# Altium PCB H-Bridge v0.1.0.PCBDOC (part 2 of 2)
Units mm, origin at the board's own origin, x right, y up, seen from the top; angles counter-clockwise.
Board outline 152.4 x 152.4 mm, 2 copper layers (Top Layer, Bottom Layer); 182 components, 35 nets, 380 pads, 57 vias.
Unrouted connection lines stored in the file: 2.
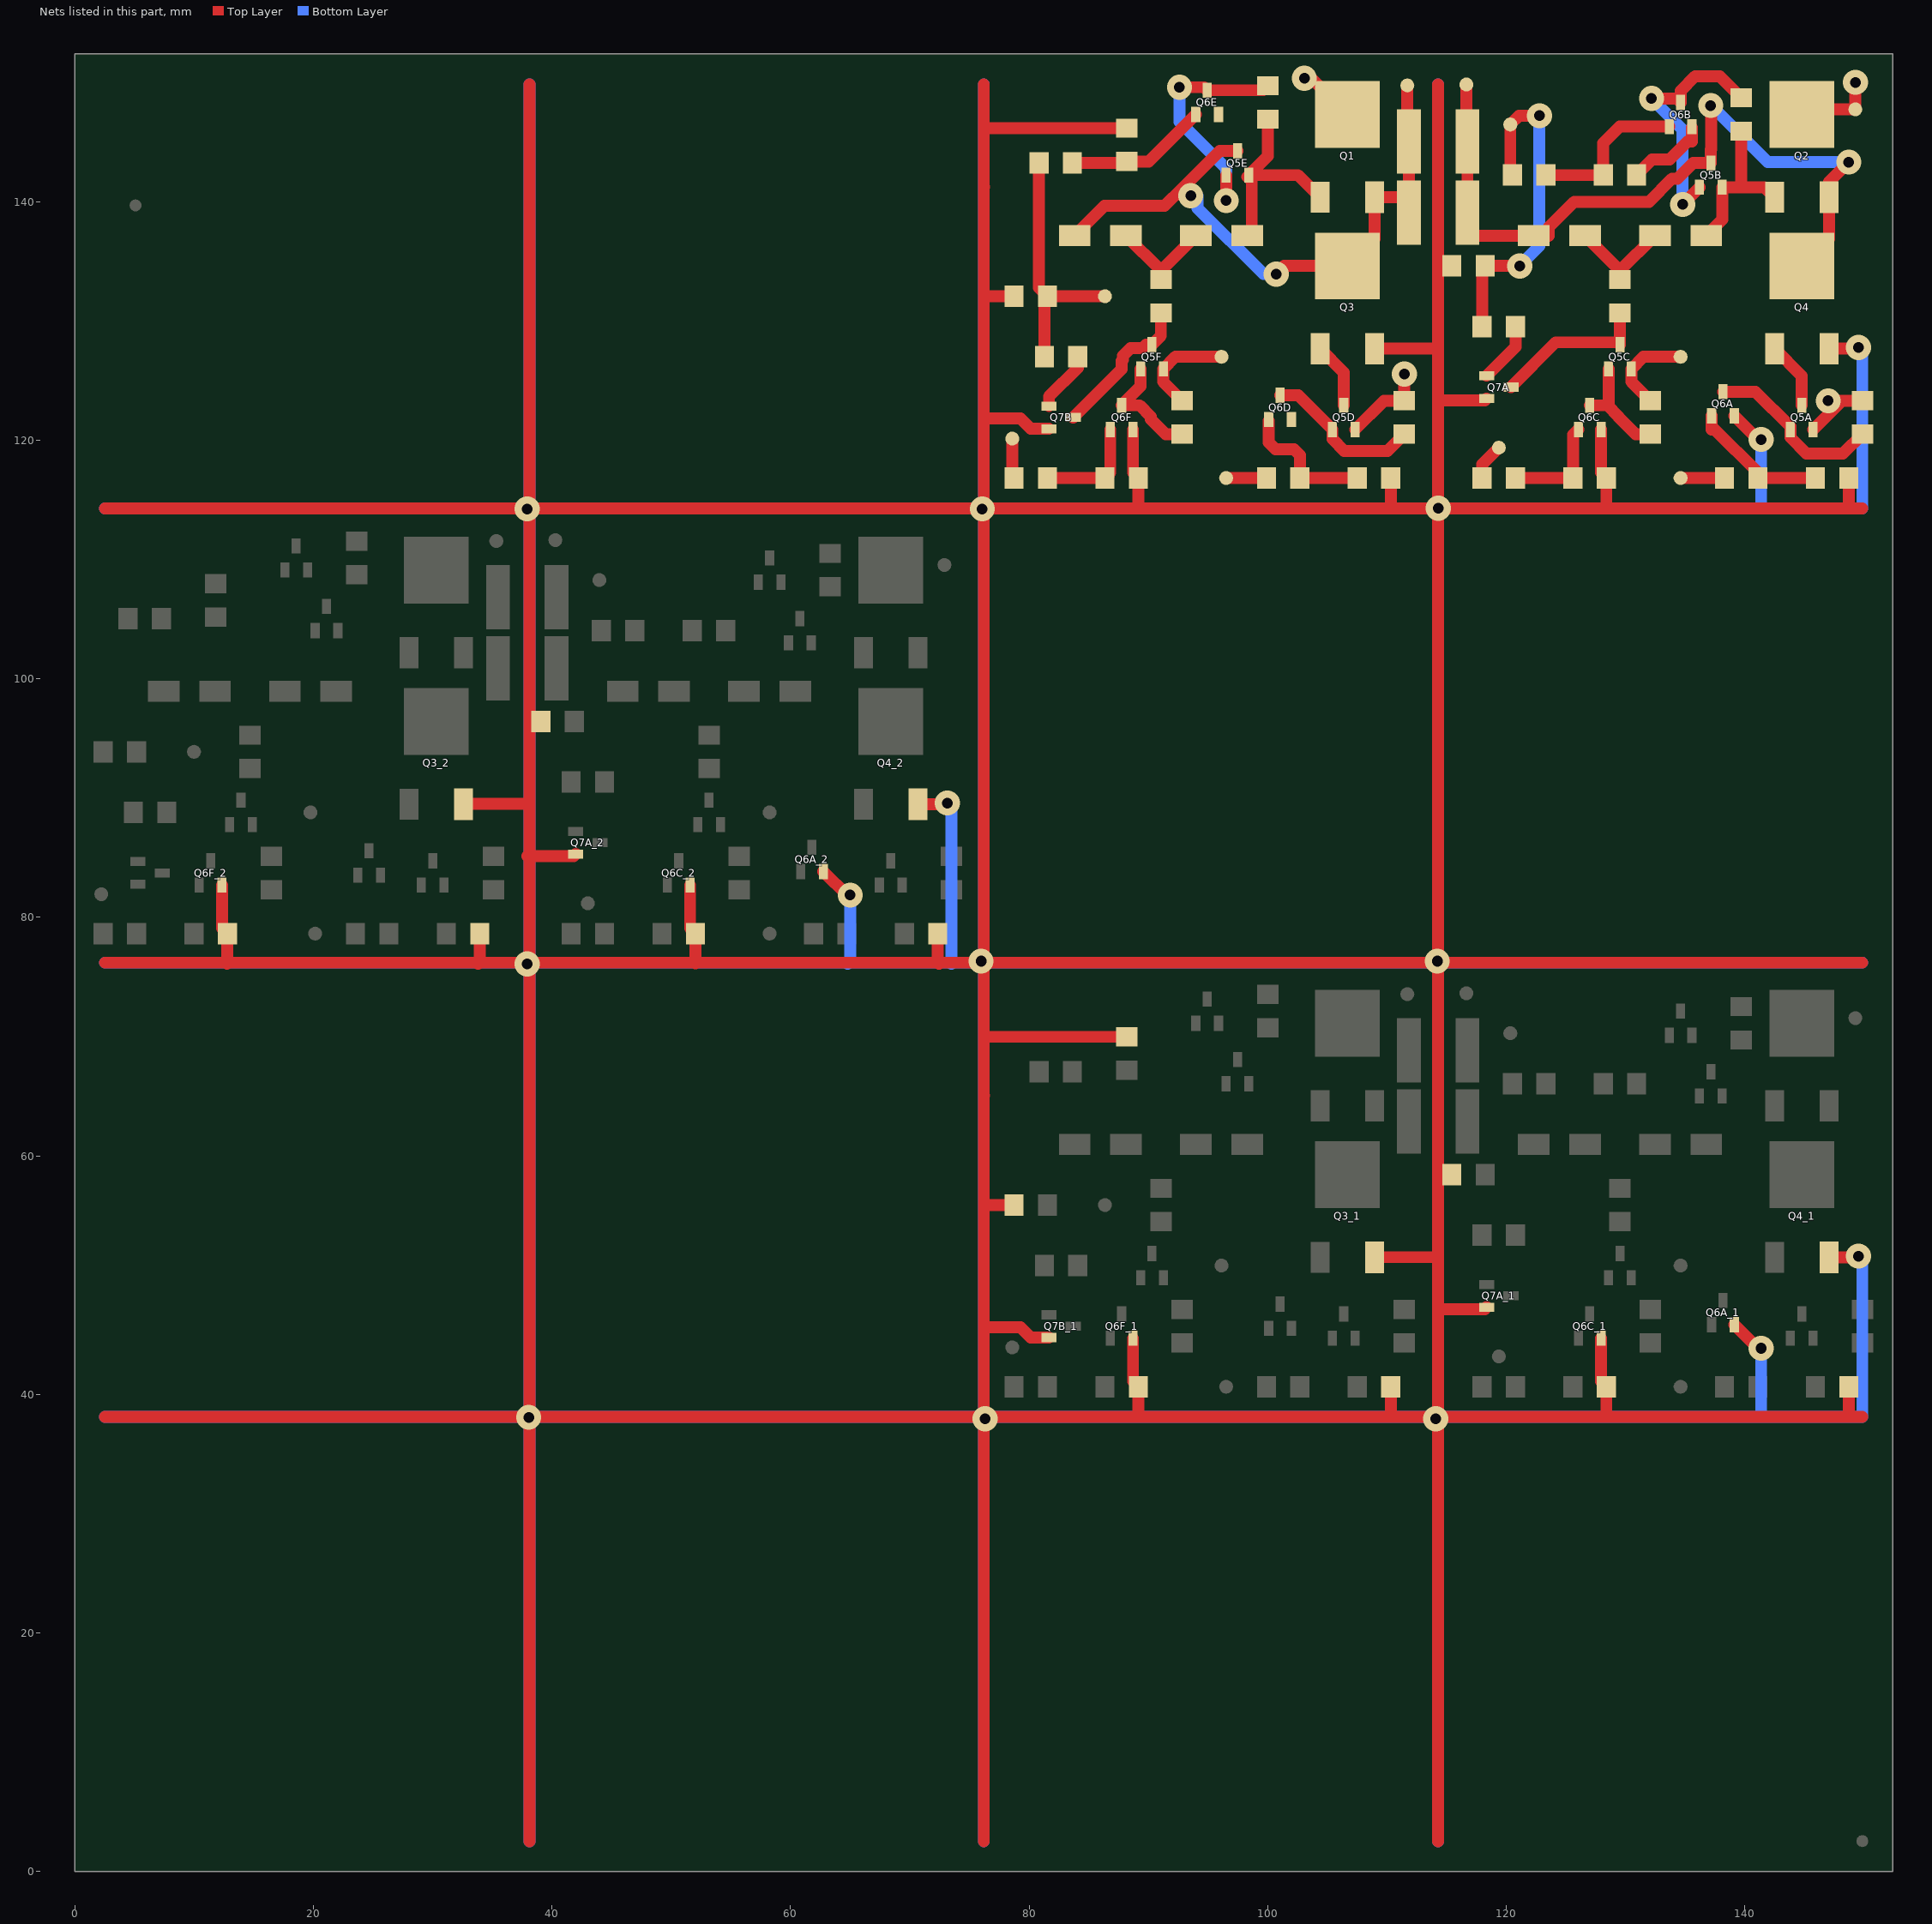
[diagram p2: the nets of this part, all layers, seen from the top]

## Part data
C1A C1A_1 C1A_2 C1B C1B_1 C1B_2: library part "100nF 1206 50V", "Non-polarized", Capacitance=100nF, Manufacturer=Kemet, Manufacturer Part Number=C1206C104K5RAC7867, Operating Temperature="-55°C ~ 125°C", Package / Case="1206 (3216 Metric)", Ratings=-, Supplier Part Number 1=399-1249-1-ND, Temperature Coefficient=X7R, Tolerance=±10%, Voltage - Rated=50V, Applications="General Purpose", Category=Capacitors, ComponentLink1Description="Spec Sheet", ComponentLink1URL=http://www.kemet.com/docfinder?Partnumber=C1206C104K5RACTU, Features=-, Height - Seated (Max)=-, Lead Spacing=-, Lead Style=-, Mounting Type="Surface Mount, MLCC", Packaging="Cut Tape (CT)", Price P/N=020101-001, Pricing 1="1=0.13, 10=0.095, 25=0.068, 50=0.052, 100=0.044, 250=0.036, 1000=0.02351 (CAD)", RoHS="RoHS Compliant", Size / Dimension="0.126\" L x 0.063\" W (3.20mm x 1.60mm)", Stock 1=910232, Supplier 1=Digi-Key, Technology=SMT, Thickness (Max)="0.035\" (0.88mm)"
C2 C2_1 C2_2 C3 C3_1 C3_2: Capacitance=1µF, Manufacturer="TDK Corporation", Manufacturer Part Number=CGA9P4X7T2W105M250KE, Operating Temperature="-55°C ~ 125°C", Package / Case=2220, Ratings=AEC-Q200, Supplier Part Number 1=445-7998-1-ND, Temperature Coefficient=X7T, Tolerance=±20%, Voltage - Rated=450V, Applications="Automotive, Boardflex Sensitive", Category=Capacitors, ComponentLink1Description="Spec Sheet", ComponentLink1URL=https://product.tdk.com/info/en/catalog/datasheets/mlcc_automotive_soft_en.pdf, Failure Rate=-, Features="Soft Termination", Height - Seated (Max)=-, Lead Spacing=-, Lead Style=-, Mounting Type="Surface Mount, MLCC", Packaging="Cut Tape (CT)", Part Status=Active, Pricing 1="1=3.11, 10=2.576, 100=2.1589, 250=1.78012 (USD)", RoHS="RoHS Compliant", Size / Dimension="0.224\" L x 0.197\" W (5.70mm x 5.00mm)", Stock 1=10247, Supplier 1=Digi-Key, Thickness (Max)="0.098\" (2.50mm)"
D1A D1A_1 D1A_2 D1B D1B_1 D1B_2 D2A D2A_1 D2A_2 D2B D2B_1 D2B_2: "Signal Diode", Capacitance @ Vr, F="10pF @ 4V, 1MHz", Current - Average Rectified (Io)=1A, Current - Reverse Leakage @ Vr="5µA @ 1000V", Manufacturer="Fairchild Semiconductor", Manufacturer Part Number=RS1M, Operating Temperature - Junction="-55°C ~ 150°C", Package / Case="DO-214AC, SMA", Supplier Device Package="SMA (DO-214AC)", Supplier Part Number 1=RS1MFSCT-ND, Voltage - DC Reverse (Vr) (Max)="1000V (1kV)", Voltage - Forward (Vf) (Max) @ If="1.3V @ 1A", Category="Discrete Semiconductor Products", ComponentLink1Description="Spec Sheet", ComponentLink1URL=http://www.fairchildsemi.com/datasheets/RS/RS1M.pdf, Diode Type=Standard, Mounting Type="Surface Mount", Packaging="Cut Tape (CT)", Price P/N=020107-002, Pricing 1="1=0.47, 10=0.339, 25=0.2632, 100=0.1993, 250=0.14092, 500=0.11282, 1000=0.08654, 2500=0.07522 (CAD)", Reverse Recovery Time (trr)=500ns, RoHS="RoHS Compliant", Speed="Fast Recovery =< 500ns, > 200mA (Io)", Stock 1=3125, Supplier 1=Digi-Key, Technology=SMT
FD1: library part "Fiducial, Top Only", Technology=Mechanical
Q1 Q1_1 Q1_2 Q2 Q2_1 Q2_2 Q3 Q3_1 Q3_2 Q4 Q4_1 Q4_2: Current - Continuous Drain (Id) @ 25°C="7.4A (Tc)", Drain to Source Voltage (Vdss)=250V, Drive Voltage (Max Rds On,  Min Rds On)=10V, Input Capacitance (Ciss) (Max) @ Vds="700pF @ 25V", Manufacturer="Fairchild/ON Semiconductor", Manufacturer Part Number=FQD9N25TM, Operating Temperature="-55°C ~ 150°C (TJ)", Package / Case="TO-252-3, DPak (2 Leads + Tab), SC-63", Power Dissipation (Max)="2.5W (Ta), 55W (Tc)", Supplier Device Package=D-Pak, Supplier Part Number 1=FQD9N25TMCT-ND, Category="Discrete Semiconductor Products", ComponentLink1Description="Spec Sheet", ComponentLink1URL=https://www.fairchildsemi.com/datasheets/FQ/FQD9N25.pdf, FET Feature=-, FET Type=N-Channel, Gate Charge (Qg) (Max) @ Vgs="20nC @ 10V", Mounting Type="Surface Mount", Packaging="Cut Tape (CT)", Part Status=Active, Pricing 1="1=0.86, 10=0.766, 100=0.597, 500=0.49316, 1000=0.38934 (USD)", Rds On (Max) @ Id, Vgs="420 mOhm", RoHS="RoHS Compliant", Stock 1=4941, Supplier 1=Digi-Key, Technology="MOSFET (Metal Oxide)", Vgs (Max)=±30V, Vgs(th) (Max) @ Id="5V @ 250µA"
Q5A Q5A_1 Q5A_2 Q5B Q5B_1 Q5B_2 Q5C Q5C_1 Q5C_2 Q5D Q5D_1 Q5D_2 Q5E Q5E_1 Q5E_2 Q5F Q5F_1 Q5F_2: library part "P Channel MOSFET 3.5A", "P Channel MOSFET", Current - Continuous Drain (Id) @ 25°C="3.5A (Ta)", Drain to Source Voltage (Vdss)=30V, Input Capacitance (Ciss) @ Vds="432pF @ 15V", Manufacturer="Diodes Incorporated", Manufacturer Part Number=DMP3130L-7, Package / Case="TO-236-3, SC-59, SOT-23-3", Power - Max=1.4W, Supplier Device Package=SOT-23-3, Supplier Part Number 1=DMP3130LDICT-ND, Category="Discrete Semiconductor Products", ComponentLink1Description="Spec Sheet", ComponentLink1URL=http://www.diodes.com/datasheets/ds31524.pdf, FET Feature="Logic Level Gate", FET Type="MOSFET P-Channel, Metal Oxide", Gate Charge (Qg) @ Vgs="12nC @ 10V", Mounting Type="Surface Mount", Packaging="Cut Tape (CT)", Price P/N=020166-006, Pricing 1="1=0.57, 10=0.444, 25=0.3736, 100=0.3047, 250=0.2524, 500=0.20848, 1000=0.15615 (CAD)", Rds On (Max) @ Id, Vgs="77 mOhm @ 4.2A, 10V", RoHS="RoHS Compliant", Stock 1=76890, Supplier 1=Digi-Key, Technology=SMT, Vgs(th) (Max) @ Id="1.3V @ 250µA"
Q6A Q6A_1 Q6A_2 Q6B Q6B_1 Q6B_2 Q6C Q6C_1 Q6C_2 Q6D Q6D_1 Q6D_2 Q6E Q6E_1 Q6E_2 Q6F Q6F_1 Q6F_2 Q7A Q7A_1 Q7A_2 Q7B Q7B_1 Q7B_2: library part "N Channel MOSFET", "N Channel MOSFET", Current - Continuous Drain (Id) @ 25°C="300mA (Ta)", Drain to Source Voltage (Vdss)=60V, Input Capacitance (Ciss) @ Vds="50pF @ 10V", Manufacturer="NXP Semiconductors", Manufacturer Part Number=2N7002,215, Package / Case="TO-236-3, SC-59, SOT-23-3", Power - Max=830mW, QuickValue=2N7002, Supplier Device Package="SOT-23 (TO-236AB)", Supplier Part Number 1=568-1369-1-ND, Category="Discrete Semiconductor Products", ComponentLink1Description="Spec Sheet", ComponentLink1URL=http://www.nxp.com/documents/data_sheet/2N7002.pdf, FET Feature="Logic Level Gate", FET Type="MOSFET N-Channel, Metal Oxide", Gate Charge (Qg) @ Vgs=-, Mounting Type="Surface Mount", Packaging="Cut Tape (CT)", Price P/N=020166-005, Pricing 1="1=0.18, 10=0.167, 25=0.1512, 100=0.109, 250=0.06416, 500=0.05324, 1000=0.03632 (CAD)", Rds On (Max) @ Id, Vgs="5 Ohm @ 500mA, 10V", RoHS="RoHS Compliant", Stock 1=765228, Supplier 1=Digi-Key, Technology=SMT, Vgs(th) (Max) @ Id="2.5V @ 250µA"
R2A R2A_1 R2A_2 R2B R2B_1 R2B_2 R2C R2C_1 R2C_2 R2D R2D_1 R2D_2 R2E R2E_1 R2E_2 R2F R2F_1 R2F_2 R4A R4A_1 R4A_2 R4B R4B_1 R4B_2 R4C R4C_1 R4C_2 R4D R4D_1 R4D_2 R4E R4E_1 R4E_2 R4F R4F_1 R4F_2 R6A R6A_1 R6A_2 R6B R6B_1 R6B_2: library part "10k 1206 1%", "Resistor", Manufacturer="Vishay Dale", Manufacturer Part Number=CRCW120610K0FKEA, Package / Case="1206 (3216 Metric)", Power (Watts)="0.25W, 1/4W", Resistance (Ohms)=10k, Supplier Part Number 1=541-10.0KFCT-ND, Temperature Coefficient=±100ppm/°C, Tolerance=±1%, Category=Resistors, ComponentLink1Description="Spec Sheet", ComponentLink1URL=http://www.vishay.com/docs/20035/dcrcwe3.pdf, Composition="Thick Film", Features="Automotive AEC-Q200 Qualified", Height="0.024\" (0.60mm)", Number of Terminations=2, Packaging="Cut Tape (CT)", Price P/N=020100-004, Pricing 1="10=0.131, 50=0.0704, 200=0.0404, 1000=0.02755 (CAD)", RoHS="RoHS Compliant", Size / Dimension="0.126\" L x 0.063\" W (3.20mm x 1.60mm)", Stock 1=393912, Supplier 1=Digi-Key, Supplier Device Package="1206 (3216 Metric)", Technology=SMT
R3A R3A_1 R3A_2 R3B R3B_1 R3B_2 R3C R3C_1 R3C_2 R3D R3D_1 R3D_2 R3E R3E_1 R3E_2 R3F R3F_1 R3F_2 R5A R5A_1 R5A_2 R5B R5B_1 R5B_2: "Resistor", Manufacturer=Yageo, Manufacturer Part Number=RC1206FR-07100RL, Operating Temperature="-55°C ~ 155°C", Package / Case="1206 (3216 Metric)", Power (Watts)="0.25W, 1/4W", Resistance (Ohms)=100R, Supplier Device Package=1206, Supplier Part Number 1=311-100FRCT-ND, Temperature Coefficient=±100ppm/°C, Tolerance=±1%, Category=Resistors, ComponentLink1Description=http://www.yageo.com/documents/recent/PYu-RC_Group_51_RoHS_L_6.pdf, ComponentLink1URL=http://www.yageo.com/documents/recent/PYu-RC_Group_51_RoHS_L_6.pdf, Composition="Thick Film", Failure Rate=-, Features="Moisture Resistant", Height - Seated (Max)="0.026\" (0.65mm)", Packaging="Cut Tape (CT)", Part Status=Active, Pricing 1="1=0.15, 10=0.044, 25=0.032, 50=0.0242, 100=0.0178, 250=0.0136, 500=0.01088, 1000=0.00801 (CAD)", RoHS="RoHS Compliant", Size / Dimension="0.122\" L x 0.063\" W (3.10mm x 1.60mm)", Stock 1=1567506, Supplier 1=Digi-Key, Technology=SMT
FD2: Technology=Mechanical

## Via types
v1: diameter 2.1, hole 0.9, Top Layer to Bottom Layer, 57 vias

## Nets (pads, with @x,y where several pads share a name; then routed paths per layer and width w, separated by ;. In a path a pad name is that pad's centre, name@x,y a point inside that pad or via, vN(x,y) a via of type N, cw(c..) or ccw(c..) an arc to the next point about the centre after c; other vN are vias at no path point)
10VDC: Q5A.2 Q5D.2 R2A.1 R2D.1 | length 13.6
  Top Layer w1: Q5D.2@107.332,120.904 109.748,123.32 R2D.1@111.46,123.32 v1(111.46,125.557) ; Q5A.2@145.732,120.904 148.148,123.32 ; v1(146.993,123.32) 148.148,123.32 ; R2A.1@149.86,123.32 148.148,123.32
GND: GND1.1 GND1_1.1 GND1_2.1 Q3.3 Q3_1.3 Q3_2.3 Q4.3 Q4_1.3 Q4_2.3 Q6A.2 Q6A_1.2 Q6A_2.2 Q6B.2 Q6C.2 Q6C_1.2 Q6C_2.2 Q6D.2 Q6E.2 Q6F.2 Q6F_1.2 Q6F_2.2 Q7A.2 Q7A_1.2 Q7A_2.2 Q7B.2 Q7B_1.2 R4A.2 R4A_1.2 R4A_2.2 R4B.2 R4C.2 R4C_1.2 R4C_2.2 R4D.2 R4D_1.2 R4D_2.2 R4E.2 R4E_1.2 R4F.2 R4F_1.2 R4F_2.2 R6A.2 R6A_1.2 R6A_2.2 R6B.2 R6B_1.2 | length 1974.6
  Top Layer w1: 2.54,38.1 149.86,38.1 ; 2.54,76.2 149.86,76.2 ; 2.54,114.3 149.86,114.3 ; R4F_2.2@12.335,79.086 Q6F_2.2@12.335,82.702 ; 12.751,76.098 12.782,76.13 R4F_2.2@12.782,78.638 ; Q3_2.3@32.588,89.484 32.609,89.505 37.799,89.505 37.821,89.484 ; 33.807,76.098 33.942,76.233 R4D_2.2@33.942,78.638 R4D_2.2@34.188,78.392 ; 37.922,85.141 41.821,85.141 Q7A_2.2@41.986,85.306 ; 38.1,2.54 38.1,149.86 ; Q6C_2.2@51.575,82.702 51.575,79.086 R4C_2.2@52.022,78.638 52.022,76.146 ; Q6A_2.2@62.751,83.845 64.808,81.788 64.884,81.864 v1(64.999,81.864) ; Q4_2.3@70.688,89.484 73.05,89.484 v1(73.152,89.586) ; R4A_2.2@72.342,78.638 72.342,76.197 72.441,76.098 ; 76.2,2.54 76.2,149.86 ; 76.2,45.669 76.243,45.626 79.285,45.626 80.144,44.768 Q7B_1.2@81.664,44.768 ; 76.2,55.855 76.225,55.88 R6B_1.2@78.74,55.88 ; 76.2,65.049 76.207,65.056 ; 76.2,70.256 76.476,69.98 R4E_1.2@88.189,69.98 ; 76.2,121.869 76.243,121.826 79.285,121.826 80.144,120.968 Q7B.2@81.664,120.968 ; 76.2,132.055 76.225,132.08 R6B.2@78.74,132.08 ; 76.2,141.249 76.207,141.256 ; 76.2,146.456 76.476,146.18 R4E.2@88.189,146.18 ; R4F_1.2@88.712,41.088 Q6F_1.2@88.712,44.704 ; R4F.2@88.712,117.288 Q6F.2@88.712,120.904 ; 89.129,38.1 89.16,38.131 R4F_1.2@89.16,40.64 ; 89.129,114.3 89.16,114.331 R4F.2@89.16,116.84 ; Q3_1.3@108.966,51.486 108.987,51.507 114.177,51.507 114.198,51.486 ; Q3.3@108.966,127.686 108.987,127.707 114.177,127.707 114.198,127.686 ; 110.185,38.1 110.32,38.235 R4D_1.2@110.32,40.64 R4D_1.2@110.566,40.394 ; 110.185,114.3 110.32,114.435 R4D.2@110.32,116.84 R4D.2@110.566,116.594 ; 114.3,2.54 114.3,149.86 ; 114.3,47.142 118.199,47.142 Q7A_1.2@118.364,47.308 ; 114.3,123.342 118.199,123.342 Q7A.2@118.364,123.508 ; Q6C_1.2@127.952,44.704 127.952,41.088 R4C_1.2@128.4,40.64 128.4,38.148 ; Q6C.2@127.952,120.904 127.952,117.288 R4C.2@128.4,116.84 128.4,114.348 ; R4B.2@130.94,142.24 132.239,143.539 133.688,143.539 135.221,145.072 135.572,145.072 Q6B.2@135.572,146.201 ; Q6A_1.2@139.128,45.847 141.186,43.79 141.262,43.866 v1(141.376,43.866) ; Q6A.2@139.128,122.047 141.186,119.99 141.262,120.066 v1(141.376,120.066) ; Q4_1.3@147.066,51.486 149.428,51.486 v1(149.53,51.587) ; Q4.3@147.066,127.686 149.428,127.686 v1(149.53,127.787) ; R4A_1.2@148.72,40.64 148.72,38.199 148.819,38.1 ; R4A.2@148.72,116.84 148.72,114.399 148.819,114.3
  Bottom Layer w1: 2.54,38.1 149.86,38.1 149.86,51.257 v1(149.53,51.587) ; 2.54,76.2 149.86,76.2 ; 2.54,114.3 149.86,114.3 149.86,127.457 v1(149.53,127.787) ; 38.1,2.54 38.1,149.86 ; 64.795,76.098 64.999,76.302 v1(64.999,81.864) ; v1(73.152,89.586) 73.482,89.256 73.482,76.098 ; 76.2,2.54 76.2,149.86 ; 114.3,2.54 114.3,149.86 ; 141.173,38.1 141.376,38.303 v1(141.376,43.866) ; 141.173,114.3 141.376,114.503 v1(141.376,120.066)
  other v1: 76.302,37.948 114.097,37.948 38.049,38.075 37.922,76.098 75.971,76.327 114.224,76.327 37.922,114.249 76.073,114.249 114.3,114.3
"Low TriggerA": "CIN Bottom Trigger1.1" R3A.1 | length 3.7
  Top Layer w1: 134.62,116.84 R3A.1@138.3,116.84
"Low TriggerB": "DIN Bottom Trigger1.1" R3D.1 | length 3.4
  Top Layer w1: 96.52,116.84 R3D.1@99.9,116.84
Net10VDCA_1: 10VDCA.1 Q5C.2 R2C.1 | length 7.9
  Top Layer w1: R2C.1@132.08,123.32 130.492,124.908 Q5C.2@130.492,125.984 131.508,127 10VDCA.1@134.62,127
Net10VDCB_1: 10VDCB.1 Q5F.2 R2F.1 | length 8.6
  Top Layer w1: R2F.1@92.84,123.32 91.252,124.908 Q5F.2@91.252,125.984 92.268,127 10VDCB.1@96.13,127
NetC1A_1: C1A.1 D1A.2 D2A.1 | length 9
  Top Layer w1: D1A.2@126.61,137.16 C1A.1@129.54,134.23 ; C1A.1@129.54,133.48 C1A.1@129.54,134.23 ; D2A.1@132.47,137.16 C1A.1@129.54,134.23
NetC1A_2: C1A.2 Q5C.3 Q7A.3 | length 13.4
  Top Layer w1: Q7A.3@120.396,124.46 124.155,128.219 129.337,128.219 Q5C.3@129.54,128.016 C1A.2@129.54,130.68
NetC1B_1: C1B.1 D1B.2 D2B.1 | length 8.3
  Top Layer w1: D1B.2@88.12,137.16 91.05,134.23 D2B.1@93.98,137.16
NetC1B_2: C1B.2 Q5F.3 Q7B.3 | length 12.7
  Top Layer w1: Q7B.3@83.696,121.92 87.747,125.972 87.747,126.647 87.866,126.766 87.866,127.075 88.511,127.719 89.495,127.719 89.792,128.016 Q5F.3@90.3,128.016 91.05,128.766 C1B.2@91.05,130.68
NetHVin1_1: HVin1.1 Q1.2 Q2.2 | length 11.2
  Top Layer w1: v1(103.073,150.368) 103.632,150.368 Q1.2@106.68,147.32 ; Q2.2@145.212,147.752 HVin1.1@149.276,147.752 v1(149.276,150.012)
NetQ1_1: D2B.2 Q1.1 Q5E.2 R2E.1 | length 17.3
  Top Layer w1: D2B.2@98.28,137.16 98.67,137.55 98.67,141.705 Q5E.2@98.28,142.095 ; R2E.1@100.013,146.936 100.013,143.828 Q5E.2@98.425,142.24 102.54,142.24 Q1.1@104.394,140.386
NetQ2_1: D2A.2 Q2.1 Q5B.2 R2B.1 | length 15.6
  Top Layer w1: D2A.2@136.77,137.16 138.112,138.502 Q5B.2@138.112,141.224 ; R2B.1@139.7,145.92 139.7,141.224 Q5B.2@138.112,141.224 ; Q2.1@142.494,140.386 141.656,141.224 Q5B.2@138.112,141.224
NetQ3_1: Q3.1 Q5D.3 | length 5.6
  Top Layer w1: Q3.1@104.394,127.686 106.38,125.7 Q5D.3@106.38,122.936
NetQ4_1: Q4.1 Q5A.3 | length 5.7
  Top Layer w1: Q4.1@142.494,127.686 144.78,125.4 Q5A.3@144.78,122.936
NetQ5A_1: Q5A.1 Q6A.3 R2A.2 | length 15
  Top Layer w1: Q6A.3@138.176,124.079 140.894,124.079 143.827,121.145 Q5A.1@143.827,120.904 143.827,120.237 145.167,118.897 148.237,118.897 R2A.2@149.86,120.52
NetQ5B_1: Q5B.1 Q6B.3 R2B.2 | length 21.9
  Top Layer w1: v1(132.182,148.666) 134.29,148.666 Q6B.3@134.62,148.336 134.62,149.301 135.838,150.519 137.901,150.519 R2B.2@139.7,148.72 ; v1(134.798,139.776) 134.798,139.814 Q5B.1@136.207,141.224
  Bottom Layer w1: v1(132.182,148.666) 134.772,146.075 134.772,139.751 v1(134.798,139.776)
NetQ5C_1: Q5C.1 Q6C.3 R2C.2 | length 9.1
  Top Layer w1: Q6C.3@127,122.936 128.492,122.936 129.433,121.995 129.433,121.95 130.864,120.52 R2C.2@132.08,120.52 ; 128.587,123.031 Q5C.1@128.587,125.984
NetQ5D_1: Q5D.1 Q6D.3 R2D.2 | length 13.4
  Top Layer w1: Q6D.3@101.041,123.774 102.557,123.774 Q5D.1@105.427,120.904 105.427,120.099 106.426,119.101 110.041,119.101 R2D.2@111.46,120.52
NetQ5E_1: Q5E.1 Q6E.3 R2E.2 | length 20.9
  Top Layer w1: v1(92.608,149.606) 94.678,149.606 Q6E.3@94.932,149.352 99.629,149.352 R2E.2@100.013,149.736 ; v1(96.52,140.106) Q5E.1@96.52,142.24
  Bottom Layer w1: v1(92.608,149.606) 92.608,146.71 96.52,142.799 v1(96.52,140.106)
NetQ5F_1: Q5F.1 Q6F.3 R2F.2 | length 9.9
  Top Layer w1: Q5F.1@89.347,125.984 89.347,124.523 Q6F.3@87.76,122.936 89.252,122.936 90.193,121.995 90.193,121.777 91.451,120.52 R2F.2@92.84,120.52
NetQ6A_1: Q6A.1 R3A.2 R4A.1 | length 11.8
  Top Layer w1: Q6A.1@137.223,122.047 137.223,120.911 137.49,120.911 141.1,117.302 R3A.2@141.1,116.84 R4A.1@145.92,116.84
NetQ6B_1: Q6B.1 R3B.2 R4B.1 | length 13.6
  Top Layer w1: R3B.2@123.32,142.24 R4B.1@128.14,142.24 128.14,144.929 129.515,146.304 Q6B.1@133.667,146.304
NetQ6C_1: Q6C.1 R3C.2 R4C.1 | length 9.1
  Top Layer w1: R3C.2@120.78,116.84 R4C.1@125.6,116.84 125.6,120.457 Q6C.1@126.047,120.904
NetQ6D_1: Q6D.1 R3D.2 R4D.1 | length 11.6
  Top Layer w1: Q6D.1@100.089,121.639 100.089,119.825 100.673,119.24 102.2,119.24 102.7,118.74 R3D.2@102.7,116.84 R4D.1@107.52,116.84
NetQ6E_1: Q6E.1 R3E.2 R4E.1 | length 12.2
  Top Layer w1: R3E.2@83.633,143.256 R4E.1@88.453,143.256 ; R4E.1@88.189,143.38 90.04,143.38 Q6E.1@93.98,147.32
NetQ6F_1: Q6F.1 R3F.2 R4F.1 | length 9.1
  Top Layer w1: R3F.2@81.54,116.84 R4F.1@86.36,116.84 86.807,117.287 Q6F.1@86.807,120.904
NetQ7A_1: Q7A.1 R5A.2 | length 5.1
  Top Layer w1: Q7A.1@118.364,125.413 120.78,127.829 R5A.2@120.78,129.54
NetQ7B_1: Q7B.1 R5B.2 | length 5.1
  Top Layer w1: Q7B.1@81.664,122.873 81.664,123.676 84.08,126.092 R5B.2@84.08,127
"Top Turn OffA": "CIN Top Off1.1" R3B.1 R5A.1 R6A.1 | length 28.2
  Top Layer w1: R5A.1@117.98,129.54 117.98,134.36 R6A.1@118.24,134.62 v1(121.133,134.62) ; R3B.1@120.345,142.415 120.345,146.482 121.082,147.218 v1(122.784,147.218)
  Bottom Layer w1: v1(121.133,134.62) 122.784,136.271 v1(122.784,147.218)
"Top Turn OffB": "DIN Top Off1.1" R3E.1 R5B.1 R6B.1 | length 21.5
  Top Layer w1: R3E.1@80.833,143.256 80.833,132.787 R6B.1@81.54,132.08 ; R5B.1@81.28,127 81.28,131.82 R6B.1@81.54,132.08 ; 86.36,132.08 R6B.1@81.54,132.08
"Top Turn OnA": "CIN Top On1.1" R3C.1 | length 3.1
  Top Layer w1: R3C.1@117.98,116.84 117.98,117.98 119.38,119.38
"Top Turn OnB": "DIN Top On1.1" R3F.1 | length 3.1
  Top Layer w1: R3F.1@78.588,116.992 78.588,120.142
VbridgeA: C2.2 C3.2 D1A.1 Q2.3 Q4.2 Q5B.3 Vout2.1 | length 61.3
  Top Layer w1: C3.2@116.662,145.147 Vout2.1@116.662,149.835 ; C3.2@116.75,145.059 C2.2@116.75,139.09 116.75,137.428 117.018,137.16 D1A.1@122.31,137.16 123.571,137.16 123.571,137.877 125.699,140.005 131.96,140.005 133.895,141.939 134.351,141.939 135.668,143.256 Q5B.3@137.16,143.256 137.15,143.266 137.15,144.386 137.172,144.409 137.172,148.053 v1(137.15,148.076) ; Q4.2@147.066,136.906 Q2.3@147.066,140.386 147.066,141.681 v1(148.717,143.332)
  Bottom Layer w1: v1(137.15,148.076) 137.191,148.076 141.935,143.332 v1(148.717,143.332)
VbridgeB: C2.1 C3.1 D1B.1 Q1.3 Q3.2 Q5E.3 Vout1.1 | length 51.1
  Top Layer w1: D1B.1@83.82,137.16 86.316,139.656 91.364,139.656 v1@92.885,141.176 ; v1(93.548,140.513) v1@92.885,141.176 ; Q5E.3@97.472,144.272 95.98,144.272 v1@92.885,141.176 ; v1(100.711,133.934) 101.397,134.62 Q3.2@106.68,134.62 ; Q3.2@108.966,136.906 Q1.3@108.966,140.386 C2.1@111.749,140.386 ; C3.1@111.709,145.2 Vout1.1@111.709,149.758 ; C2.1@111.85,139.09 C3.1@111.85,145.059
  Bottom Layer w1: v1(93.548,140.513) 94.132,140.513 94.132,139.453 99.652,133.934 v1(100.711,133.934)
pads on no net: 10VDCA_1.1 10VDCA_2.1 10VDCB_1.1 10VDCB_2.1 "CIN Bottom Trigger1_1.1" "CIN Bottom Trigger1_2.1" "CIN Top Off1_1.1" "CIN Top Off1_2.1" "CIN Top On1_1.1" "CIN Top On1_2.1" "DIN Bottom Trigger1_1.1" "DIN Bottom Trigger1_2.1" "DIN Top Off1_1.1" "DIN Top Off1_2.1" "DIN Top On1_1.1" "DIN Top On1_2.1" C1A_1.1 C1A_1.2 C1A_2.1 C1A_2.2 C1B_1.1 C1B_1.2 C1B_2.1 C1B_2.2 C2_1.1 C2_1.2 C2_2.1 C2_2.2 C3_1.1 C3_1.2 C3_2.1 C3_2.2 D1A_1.1 D1A_1.2 D1A_2.1 D1A_2.2 D1B_1.1 D1B_1.2 D1B_2.1 D1B_2.2 D2A_1.1 D2A_1.2 D2A_2.1 D2A_2.2 D2B_1.1 D2B_1.2 D2B_2.1 D2B_2.2 FD1.0 FD2.0 HVin1_1.1 HVin1_2.1 Q1_1.1 Q1_1.2 Q1_1.3 Q1_2.1 Q1_2.2 Q1_2.3 Q2_1.1 Q2_1.2 Q2_1.3 Q2_2.1 Q2_2.2 Q2_2.3 Q3_1.1 Q3_1.2 Q3_2.1 Q3_2.2 Q4_1.1 Q4_1.2 Q4_2.1 Q4_2.2 Q5A_1.1 Q5A_1.2 Q5A_1.3 Q5A_2.1 Q5A_2.2 Q5A_2.3 Q5B_1.1 Q5B_1.2 Q5B_1.3 Q5B_2.1 Q5B_2.2 Q5B_2.3 Q5C_1.1 Q5C_1.2 Q5C_1.3 Q5C_2.1 Q5C_2.2 Q5C_2.3 Q5D_1.1 Q5D_1.2 Q5D_1.3 Q5D_2.1 Q5D_2.2 Q5D_2.3 Q5E_1.1 Q5E_1.2 Q5E_1.3 Q5E_2.1 Q5E_2.2 Q5E_2.3 Q5F_1.1 Q5F_1.2 Q5F_1.3 Q5F_2.1 Q5F_2.2 Q5F_2.3 Q6A_1.1 Q6A_1.3 Q6A_2.1 Q6A_2.3 Q6B_1.1 Q6B_1.2 Q6B_1.3 Q6B_2.1 Q6B_2.2 Q6B_2.3 Q6C_1.1 Q6C_1.3 Q6C_2.1 Q6C_2.3 Q6D_1.1 Q6D_1.2 Q6D_1.3 Q6D_2.1 Q6D_2.2 Q6D_2.3 Q6E_1.1 Q6E_1.2 Q6E_1.3 Q6E_2.1 Q6E_2.2 Q6E_2.3 Q6F_1.1 Q6F_1.3 Q6F_2.1 Q6F_2.3 Q7A_1.1 Q7A_1.3 Q7A_2.1 Q7A_2.3 Q7B_1.1 Q7B_1.3 Q7B_2.1 Q7B_2.2 Q7B_2.3 R2A_1.1 R2A_1.2 R2A_2.1 R2A_2.2 R2B_1.1 R2B_1.2 R2B_2.1 R2B_2.2 R2C_1.1 R2C_1.2 R2C_2.1 R2C_2.2 R2D_1.1 R2D_1.2 R2D_2.1 R2D_2.2 R2E_1.1 R2E_1.2 R2E_2.1 R2E_2.2 R2F_1.1 R2F_1.2 R2F_2.1 R2F_2.2 R3A_1.1 R3A_1.2 R3A_2.1 R3A_2.2 R3B_1.1 R3B_1.2 R3B_2.1 R3B_2.2 R3C_1.1 R3C_1.2 R3C_2.1 R3C_2.2 R3D_1.1 R3D_1.2 R3D_2.1 R3D_2.2 R3E_1.1 R3E_1.2 R3E_2.1 R3E_2.2 R3F_1.1 R3F_1.2 R3F_2.1 R3F_2.2 R4A_1.1 R4A_2.1 R4B_1.1 R4B_1.2 R4B_2.1 R4B_2.2 R4C_1.1 R4C_2.1 R4D_1.1 R4D_2.1 R4E_1.1 R4E_2.1 R4E_2.2 R4F_1.1 R4F_2.1 R5A_1.1 R5A_1.2 R5A_2.1 R5A_2.2 R5B_1.1 R5B_1.2 R5B_2.1 R5B_2.2 R6A_1.1 R6A_2.1 R6B_1.1 R6B_2.1 R6B_2.2 Vout1_1.1 Vout1_2.1 Vout2_1.1 Vout2_2.1
copper on no net: | length 1000.5
  Top Layer w0.2: 4.127,133.667 6.032,135.572 ; 4.127,135.572 6.032,133.667 ; 148.907,6.667 150.812,8.572 ; 148.907,8.572 150.812,6.667
  Top Layer w1: -0.178,83.668 -0.135,83.625 2.907,83.625 3.766,82.766 5.286,82.766 ; -0.178,93.853 -0.152,93.878 2.362,93.878 ; -0.178,103.048 -0.171,103.054 ; -0.178,108.255 0.099,107.978 11.811,107.978 ; 2.21,78.791 2.21,81.94 ; 4.455,105.054 4.455,94.586 5.162,93.878 ; 4.902,88.798 4.902,93.618 5.162,93.878 ; 5.162,78.638 9.982,78.638 10.43,79.086 10.43,82.702 ; 5.286,84.671 5.286,85.474 7.702,87.89 7.702,88.798 ; 7.255,105.054 12.075,105.054 ; 7.318,83.718 11.37,87.77 11.37,88.445 11.489,88.564 11.489,88.873 12.133,89.517 13.117,89.517 13.414,89.814 13.922,89.814 14.672,90.564 14.672,92.478 ; 7.442,98.958 9.938,101.454 14.987,101.454 v1@16.507,102.975 ; 9.982,93.878 5.162,93.878 ; 11.742,98.958 14.672,96.028 17.602,98.958 ; 11.811,105.178 13.662,105.178 17.602,109.118 ; 12.97,87.782 12.97,86.322 11.382,84.734 12.874,84.734 13.816,83.793 13.816,83.576 15.073,82.318 16.462,82.318 ; v1(16.231,111.404) 18.301,111.404 18.555,111.15 23.251,111.15 23.635,111.534 ; 16.462,85.118 14.875,86.706 14.875,87.782 15.891,88.798 19.752,88.798 ; v1(17.17,102.311) v1@16.507,102.975 ; 20.142,78.638 23.522,78.638 ; v1(20.142,101.905) 20.142,104.038 ; 21.095,106.07 19.603,106.07 v1@16.507,102.975 ; 21.902,98.958 22.292,99.348 22.292,103.503 21.902,103.893 ; 23.635,108.734 23.635,105.626 22.047,104.038 26.162,104.038 28.016,102.184 ; 23.711,83.438 23.711,81.623 24.295,81.038 25.822,81.038 26.322,80.538 26.322,78.638 31.142,78.638 ; v1(24.333,95.733) 25.019,96.418 30.302,96.418 ; 24.663,85.573 26.179,85.573 29.05,82.702 29.05,81.898 30.048,80.899 33.663,80.899 35.082,82.318 ; v1@26.695,112.166 27.254,112.166 30.302,109.118 ; 28.016,89.484 30.002,87.498 30.002,84.734 ; 30.955,82.702 33.371,85.118 35.082,85.118 v1(35.082,87.355) ; 32.588,98.704 32.588,102.184 35.371,102.184 ; 35.331,106.999 35.331,111.557 ; 35.472,100.889 35.472,106.858 ; 40.284,106.946 40.284,111.633 ; 40.372,106.858 40.372,100.889 40.372,99.226 40.64,98.958 45.932,98.958 47.193,98.958 47.193,99.675 49.321,101.803 55.583,101.803 57.517,103.737 57.973,103.737 59.29,105.054 60.782,105.054 60.772,105.064 60.772,106.185 60.795,106.207 60.795,109.852 v1(60.772,109.874) ; 41.602,78.638 41.602,79.778 43.002,81.178 ; 41.602,91.338 41.602,96.158 41.862,96.418 v1(44.755,96.418) ; 41.986,87.211 44.402,89.627 44.402,91.338 ; 43.967,104.213 43.967,108.28 44.704,109.017 v1(46.406,109.017) ; 44.018,86.258 47.777,90.018 52.959,90.018 53.162,89.814 53.162,92.478 ; 44.402,78.638 49.222,78.638 49.222,82.255 49.67,82.702 ; 46.942,104.038 51.762,104.038 51.762,106.728 53.137,108.102 57.29,108.102 ; 50.232,98.958 53.162,96.028 ; 50.622,84.734 52.114,84.734 53.056,83.793 53.056,83.749 54.486,82.318 55.702,82.318 ; 52.21,84.83 52.21,87.782 ; 53.162,95.278 53.162,96.028 ; 54.562,104.038 55.861,105.337 57.31,105.337 58.843,106.87 59.195,106.87 59.195,107.999 ; 55.702,85.118 54.115,86.706 54.115,87.782 55.131,88.798 58.242,88.798 ; v1(55.804,110.465) 57.912,110.465 58.242,110.134 58.242,111.1 59.46,112.317 61.523,112.317 63.322,110.518 ; 56.092,98.958 53.162,96.028 ; 58.242,78.638 61.922,78.638 ; v1(58.42,101.575) 58.42,101.613 59.83,103.022 ; 60.392,98.958 61.735,100.301 61.735,103.022 ; 60.846,83.845 60.846,82.71 61.112,82.71 64.722,79.1 64.722,78.638 69.542,78.638 ; 61.798,85.877 64.516,85.877 67.45,82.944 67.45,82.702 67.45,82.036 68.79,80.696 71.86,80.696 73.482,82.318 ; 63.322,107.718 63.322,103.022 61.735,103.022 ; 66.116,89.484 68.402,87.198 68.402,84.734 ; 66.116,102.184 65.278,103.022 61.735,103.022 ; 68.834,109.55 72.898,109.55 v1(72.898,111.811) ; 69.355,82.702 71.771,85.118 ; v1(70.615,85.118) 71.771,85.118 ; 70.688,98.704 70.688,102.184 70.688,103.48 v1(72.339,105.131) ; 73.482,85.118 71.771,85.118 ; 78.588,40.792 78.588,43.942 ; 80.833,67.056 80.833,56.587 81.54,55.88 ; 81.28,50.8 81.28,55.62 81.54,55.88 ; 81.54,40.64 86.36,40.64 86.807,41.087 86.807,44.704 ; 81.664,46.673 81.664,47.476 84.08,49.892 84.08,50.8 ; 83.633,67.056 88.453,67.056 ; 83.696,45.72 87.747,49.772 87.747,50.447 87.866,50.566 87.866,50.875 88.511,51.519 89.495,51.519 89.792,51.816 90.3,51.816 91.05,52.566 91.05,54.48 ; 83.82,60.96 86.316,63.456 91.364,63.456 v1@92.885,64.976 ; 86.36,55.88 81.54,55.88 ; 88.12,60.96 91.05,58.03 93.98,60.96 ; 88.189,67.18 90.04,67.18 93.98,71.12 ; 89.347,49.784 89.347,48.323 87.76,46.736 89.252,46.736 90.193,45.795 90.193,45.577 91.451,44.32 92.84,44.32 ; v1(92.608,73.406) 94.678,73.406 94.932,73.152 99.629,73.152 100.013,73.536 ; 92.84,47.12 91.252,48.708 91.252,49.784 92.268,50.8 96.13,50.8 ; v1(93.548,64.313) v1@92.885,64.976 ; 96.52,40.64 99.9,40.64 ; v1(96.52,63.906) 96.52,66.04 ; 97.472,68.072 95.98,68.072 v1@92.885,64.976 ; 98.28,60.96 98.67,61.35 98.67,65.505 98.28,65.895 ; 100.013,70.736 100.013,67.628 98.425,66.04 102.54,66.04 104.394,64.186 ; 100.089,45.439 100.089,43.625 100.673,43.04 102.2,43.04 102.7,42.54 102.7,40.64 107.52,40.64 ; v1(100.711,57.734) 101.397,58.42 106.68,58.42 ; 101.041,47.574 102.557,47.574 105.427,44.704 105.427,43.899 106.426,42.901 110.041,42.901 111.46,44.32 ; v1@103.073,74.168 103.632,74.168 106.68,71.12 ; 104.394,51.486 106.38,49.5 106.38,46.736 ; 107.332,44.704 109.748,47.12 111.46,47.12 v1(111.46,49.357) ; 108.966,60.706 108.966,64.186 111.749,64.186 ; 111.709,69 111.709,73.558 ; 111.85,62.89 111.85,68.859 ; 116.662,68.947 116.662,73.635 ; 116.75,68.859 116.75,62.89 116.75,61.228 117.018,60.96 122.31,60.96 123.571,60.96 123.571,61.677 125.699,63.805 131.96,63.805 133.895,65.739 134.351,65.739 135.668,67.056 137.16,67.056 137.15,67.066 137.15,68.186 137.172,68.209 137.172,71.853 v1(137.15,71.876) ; 117.98,40.64 117.98,41.78 119.38,43.18 ; 117.98,53.34 117.98,58.16 118.24,58.42 v1(121.133,58.42) ; 118.364,49.213 120.78,51.629 120.78,53.34 ; 120.345,66.215 120.345,70.282 121.082,71.018 v1(122.784,71.018) ; 120.396,48.26 124.155,52.019 129.337,52.019 129.54,51.816 129.54,54.48 ; 120.78,40.64 125.6,40.64 125.6,44.257 126.047,44.704 ; 123.32,66.04 128.14,66.04 128.14,68.729 129.515,70.104 133.667,70.104 ; 126.61,60.96 129.54,58.03 ; 127,46.736 128.492,46.736 129.433,45.795 129.433,45.75 130.864,44.32 132.08,44.32 ; 128.587,46.831 128.587,49.784 ; 129.54,57.28 129.54,58.03 ; 130.94,66.04 132.239,67.339 133.688,67.339 135.221,68.872 135.572,68.872 135.572,70.001 ; 132.08,47.12 130.492,48.708 130.492,49.784 131.508,50.8 134.62,50.8 ; v1(132.182,72.466) 134.29,72.466 134.62,72.136 134.62,73.101 135.838,74.319 137.901,74.319 139.7,72.52 ; 132.47,60.96 129.54,58.03 ; 134.62,40.64 138.3,40.64 ; v1(134.798,63.576) 134.798,63.614 136.207,65.024 ; 136.77,60.96 138.112,62.302 138.112,65.024 ; 137.223,45.847 137.223,44.711 137.49,44.711 141.1,41.102 141.1,40.64 145.92,40.64 ; 138.176,47.879 140.894,47.879 143.827,44.945 143.827,44.704 143.827,44.037 145.167,42.697 148.237,42.697 149.86,44.32 ; 139.7,69.72 139.7,65.024 138.112,65.024 ; 142.494,51.486 144.78,49.2 144.78,46.736 ; 142.494,64.186 141.656,65.024 138.112,65.024 ; 145.212,71.552 149.276,71.552 v1(149.276,73.812) ; 145.732,44.704 148.148,47.12 ; v1(146.993,47.12) 148.148,47.12 ; 147.066,60.706 147.066,64.186 147.066,65.481 v1(148.717,67.132) ; 149.86,47.12 148.148,47.12
  Bottom Layer w0.2: 4.127,136.207 6.032,138.112 ; 4.127,138.112 6.032,136.207 ; 148.907,4.127 150.812,6.032 ; 148.907,6.032 150.812,4.127
  Bottom Layer w1: v1(16.231,111.404) 16.231,108.509 20.142,104.597 v1(20.142,101.905) ; v1(17.17,102.311) 17.755,102.311 17.755,101.252 23.274,95.733 v1(24.333,95.733) ; v1(44.755,96.418) 46.406,98.069 v1(46.406,109.017) ; v1(55.804,110.465) 58.395,107.874 58.395,101.549 v1(58.42,101.575) ; v1(60.772,109.874) 60.814,109.874 65.557,105.131 v1(72.339,105.131) ; v1(92.608,73.406) 92.608,70.51 96.52,66.599 v1(96.52,63.906) ; v1(93.548,64.313) 94.132,64.313 94.132,63.253 99.652,57.734 v1(100.711,57.734) ; v1(121.133,58.42) 122.784,60.071 v1(122.784,71.018) ; v1(132.182,72.466) 134.772,69.875 134.772,63.551 v1(134.798,63.576) ; v1(137.15,71.876) 137.191,71.876 141.935,67.132 v1(148.717,67.132)
  other v1: 102.718,73.889 26.289,111.862

## Polygon pours and split planes (outlines as drawn)
GND on Bottom Layer "Top Layer-No Net 1" (solid, pour order 26): 0,-0.001 152.4,-0.001 152.4,152.399 0,152.399
GND on Top Layer "Top Layer-No Net 1" (solid, remove dead copper, pour order 27): 0,0 152.4,0 152.4,152.4 0,152.4

## Keep-outs
Keep-Out Layer:
  the board outline again, w0.762

## Other copper
Top Layer:
  text "'.ProjectTitle' / '.ProjectRevision' / CC" at 116.84,12.7 h6.1

## Silkscreen, mask and mechanical layers (free items; w line width, h text height)
Board Outline (M1):
  the board outline again, w0.025
Drill Drawing:
  text ".legend" at 179.07,27.686 h0.76